# EAGLE board MoDsMega (EAGLE 4.16), part 1 of 2
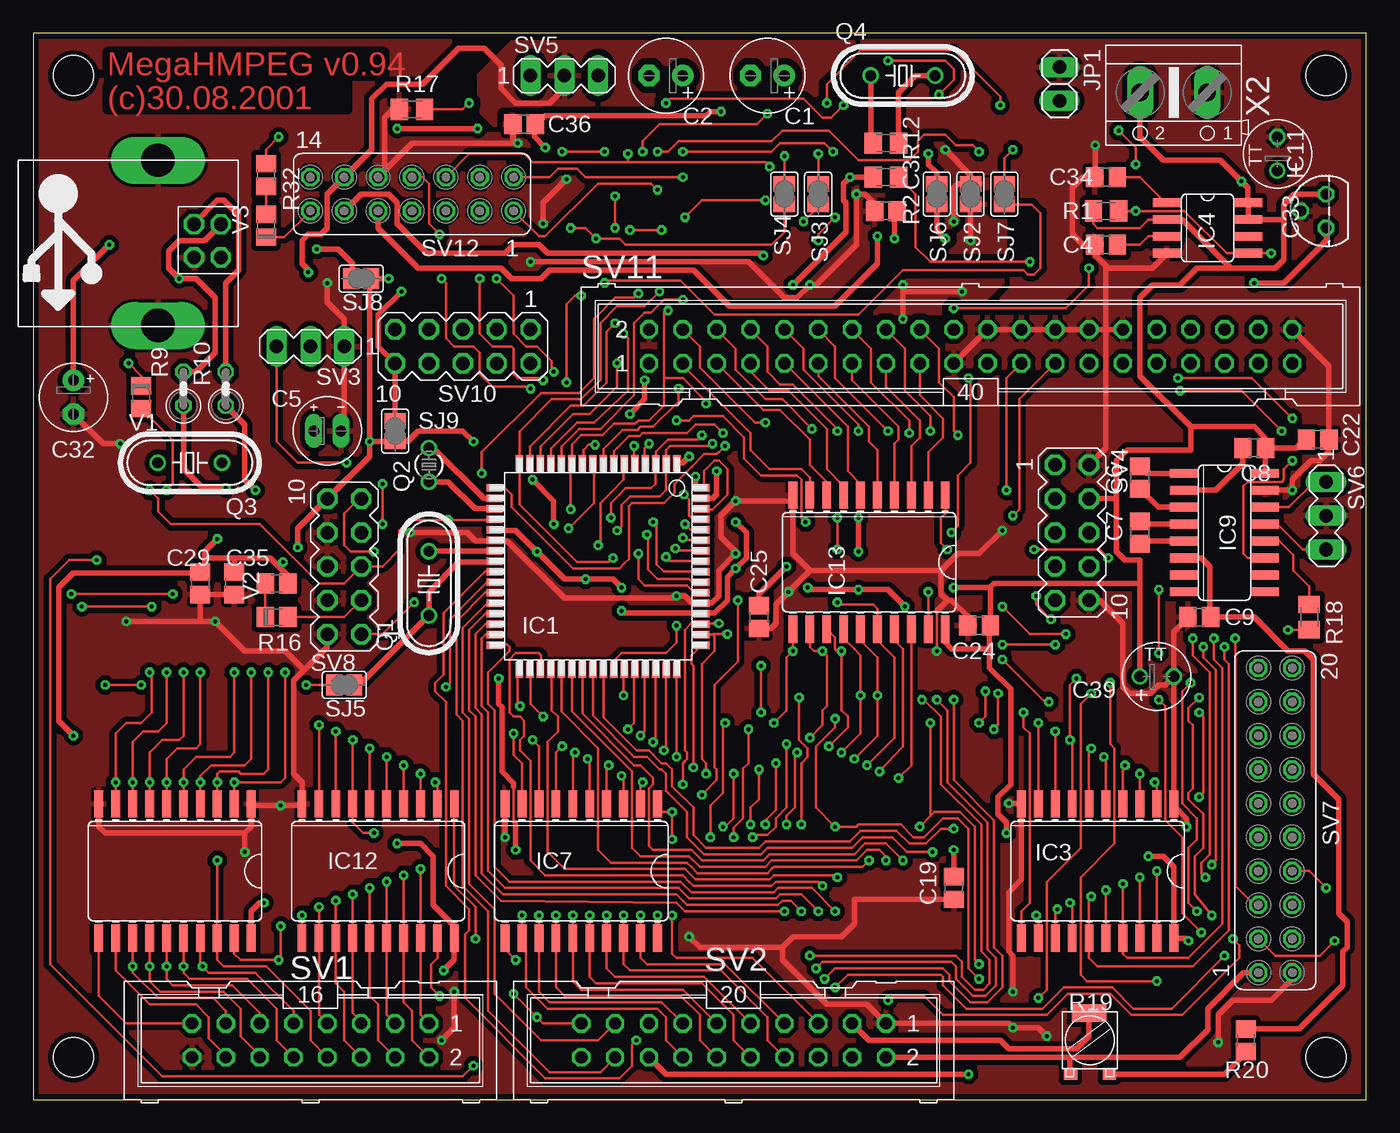
[diagram p0: board, top side]
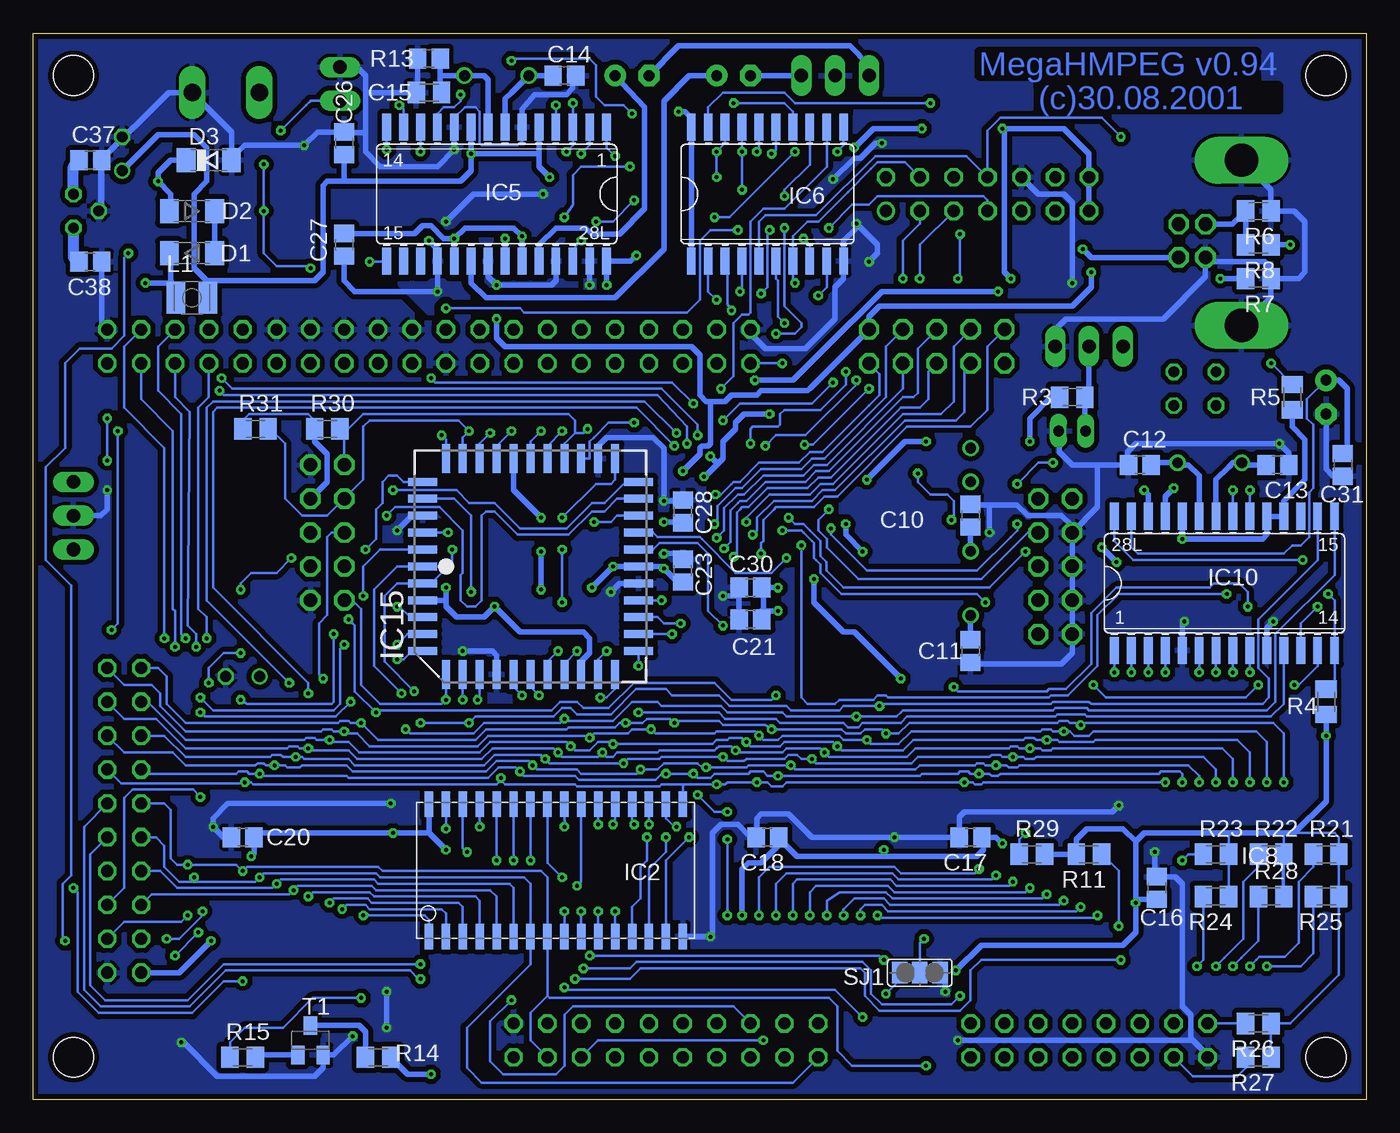
[diagram p1: board, bottom side, seen from below]

Size 100 x 80 mm. Coordinates in mm from the lower left corner, seen from the top.
Outline: 0,0 100,0 100,80 0,80 0,0
Copper layers (1*16): Top 0.035mm / dielectric 1.5mm / Bottom 0.035mm
Design rules "default": minimum track width 0.2mm, minimum drill 0.3mm, track to track 0.2mm, track to pad 0.2mm, pad to pad 0.2mm, via to via 0.2mm, smd to smd 0.2mm, copper to edge 0.2mm, drill to drill 8mil, minimum pad ring 0.2mm, minimum via ring 0.2mm, stop-mask expansion 0mil, vias tented up to drill 0mil, thermal gap 10mil
Holes 3 mm at 3.01,76.83 3.01,3.17 96.99,3.17 96.99,76.83
tRestrict: area 8.1,69.2 to 10.6,71.7; area 8.1,56.8 to 10.6,59.4
bRestrict: area 8.1,69.2 to 10.6,71.7; area 8.1,56.8 to 10.6,59.4

## Footprints (pad centres in the part's own frame; a part is rotated, then mirrored left to right if it is on the bottom)
E2,5-6 = drill 0.813 pad 1.6 round: + -1.27,0 | drill 0.813 pad 1.6 octagon: - 1.27,0
C0805 = smd 1.3 x 1.5: 1 -0.85,0; 2 0.85,0
E2-5 = drill 0.813 pad 1.27 long: + -1.016,0; - 1.016,0
E2,5-5 = drill 0.813 pad 1.6 round: + -1.27,0 | drill 0.813 pad 1.6 octagon: - 1.27,0
TT2D5 = drill 0.813 round: + 1.27,0 | drill 0.813 octagon: - -1.27,0
SOD80 = smd 1.4 x 1.8: 1 -1.7,0; 2 1.7,0
SOD80C = smd 1.4 x 1.8: A 1.7,0; C -1.7,0
TQFP64 = smd 1.194 x 0.559: 1 -7.76,5.905; 2 -7.76,5.118; 3 -7.76,4.331; 4 -7.76,3.543; 5 -7.76,2.756; 6 -7.76,1.968; 7 -7.76,1.181; 8 -7.76,0.394; 9 -7.76,-0.394; 10 -7.76,-1.181; 11 -7.76,-1.968; 12 -7.76,-2.756; 13 -7.76,-3.543; 14 -7.76,-4.331; 15 -7.76,-5.118; 16 -7.76,-5.905; 33 7.76,-5.905; 34 7.76,-5.118; 35 7.76,-4.331; 36 7.76,-3.543; 37 7.76,-2.756; 38 7.76,-1.968; 39 7.76,-1.181; 40 7.76,-0.394; 41 7.76,0.394; 42 7.76,1.181; 43 7.76,1.968; 44 7.76,2.756; 45 7.76,3.543; 46 7.76,4.331; 47 7.76,5.118; 48 7.76,5.905 | smd 0.559 x 1.194: 17 -5.905,-7.76; 18 -5.118,-7.76; 19 -4.331,-7.76; 20 -3.543,-7.76; 21 -2.756,-7.76; 22 -1.968,-7.76; 23 -1.181,-7.76; 24 -0.394,-7.76; 25 0.394,-7.76; 26 1.181,-7.76; 27 1.968,-7.76; 28 2.756,-7.76; 29 3.543,-7.76; 30 4.331,-7.76; 31 5.118,-7.76; 32 5.905,-7.76; 49 5.905,7.76; 50 5.118,7.76; 51 4.331,7.76; 52 3.543,7.76; 53 2.756,7.76; 54 1.968,7.76; 55 1.181,7.76; 56 0.394,7.76; 57 -0.394,7.76; 58 -1.181,7.76; 59 -1.968,7.76; 60 -2.756,7.76; 61 -3.543,7.76; 62 -4.331,7.76; 63 -5.118,7.76; 64 -5.905,7.76
SOJ32/4 = smd 0.635 x 1.905: 1 -8.89,-4.902; 2 -7.62,-4.902; 3 -6.35,-4.902; 4 -5.08,-4.902; 5 -3.81,-4.902; 6 -2.54,-4.902; 7 -1.27,-4.902; 8 0,-4.902; 9 1.27,-4.902; 10 2.54,-4.902; 11 3.81,-4.902; 12 5.08,-4.902; 13 6.35,-4.902; 14 7.62,-4.902; 15 8.89,-4.902; 16 10.16,-4.902; 17 10.16,5.029; 18 8.89,5.029; 19 7.62,5.029; 20 6.35,5.029; 21 5.08,5.029; 22 3.81,5.029; 23 2.54,5.029; 24 1.27,5.029; 25 0,5.029; 26 -1.27,5.029; 27 -2.54,5.029; 28 -3.81,5.029; 29 -5.08,5.029; 30 -6.35,5.029; 31 -7.62,5.029; 32 -8.89,5.029
SO20W = smd 0.66 x 2.032: 1 -5.715,-5.029; 2 -4.445,-5.029; 3 -3.175,-5.029; 4 -1.905,-5.029; 5 -0.635,-5.029; 6 0.635,-5.029; 7 1.905,-5.029; 8 3.175,-5.029; 9 4.445,-5.029; 10 5.715,-5.029; 11 5.715,5.029; 12 4.445,5.029; 13 3.175,5.029; 14 1.905,5.029; 15 0.635,5.029; 16 -0.635,5.029; 17 -1.905,5.029; 18 -3.175,5.029; 19 -4.445,5.029; 20 -5.715,5.029
SO08 = smd 0.66 x 2.032: 1 -1.905,-3.073; 2 -0.635,-3.073; 3 0.635,-3.073; 4 1.905,-3.073; 5 1.905,3.073; 6 0.635,3.073; 7 -0.635,3.073; 8 -1.905,3.073
SOIC28 = smd 0.66 x 2.032: 1 -8.255,-5.029; 2 -6.985,-5.029; 3 -5.715,-5.029; 4 -4.445,-5.029; 5 -3.175,-5.029; 6 -1.905,-5.029; 7 -0.635,-5.029; 8 0.635,-5.029; 9 1.905,-5.029; 10 3.175,-5.029; 11 4.445,-5.029; 12 5.715,-5.029; 13 6.985,-5.029; 14 8.255,-5.029; 15 8.255,5.029; 16 6.985,5.029; 17 5.715,5.029; 18 4.445,5.029; 19 3.175,5.029; 20 1.905,5.029; 21 0.635,5.029; 22 -0.635,5.029; 23 -1.905,5.029; 24 -3.175,5.029; 25 -4.445,5.029; 26 -5.715,5.029; 27 -6.985,5.029; 28 -8.255,5.029
SO16 = smd 0.66 x 2.032: 1 -4.445,-3.073; 2 -3.175,-3.073; 3 -1.905,-3.073; 4 -0.635,-3.073; 5 0.635,-3.073; 6 1.905,-3.073; 7 3.175,-3.073; 8 4.445,-3.073; 9 4.445,3.073; 10 3.175,3.073; 11 1.905,3.073; 12 0.635,3.073; 13 -0.635,3.073; 14 -1.905,3.073; 15 -3.175,3.073; 16 -4.445,3.073
TO92 = drill 0.813 octagon: 1 -1.27,0; 2 0,1.905; 3 1.27,0
PLCC44 = smd 0.6 x 2.2: 1 0,8.1; 2 -1.27,8.1; 3 -2.54,8.1; 4 -3.81,8.1; 5 -5.08,8.1; 6 -6.35,8.1; 18 -6.35,-8.1; 19 -5.08,-8.1; 20 -3.81,-8.1; 21 -2.54,-8.1; 22 -1.27,-8.1; 23 0,-8.1; 24 1.27,-8.1; 25 2.54,-8.1; 26 3.81,-8.1; 27 5.08,-8.1; 28 6.35,-8.1; 40 6.35,8.1; 41 5.08,8.1; 42 3.81,8.1; 43 2.54,8.1; 44 1.27,8.1 | smd 2.2 x 0.6: 7 -8.1,6.35; 8 -8.1,5.08; 9 -8.1,3.81; 10 -8.1,2.54; 11 -8.1,1.27; 12 -8.1,0; 13 -8.1,-1.27; 14 -8.1,-2.54; 15 -8.1,-3.81; 16 -8.1,-5.08; 17 -8.1,-6.35; 29 8.1,-6.35; 30 8.1,-5.08; 31 8.1,-3.81; 32 8.1,-2.54; 33 8.1,-1.27; 34 8.1,0; 35 8.1,1.27; 36 8.1,2.54; 37 8.1,3.81; 38 8.1,5.08; 39 8.1,6.35
1X02 = drill 1.016 long: 1 -1.27,0; 2 1.27,0
L2825P = smd 1.4 x 2.4: 1 -1.2,0; 2 1.2,0
HC49/S = drill 0.813 round: 1 -2.413,0; 2 2.413,0
TC26V = drill 0.813 round: 1 -1.27,0; 2 1.27,0
M0805 = smd 1.3 x 1.6: 1 -0.95,0; 2 0.95,0
0207/2V = drill 0.813 octagon: 1 -1.27,0; 2 1.27,0
R0805 = smd 1.3 x 1.5: 1 -0.85,0; 2 0.85,0
SMD1/6 = smd 1 x 0.9: P1 -1.395,-2.52; P2 1.52,-2.52 | smd 2.6 x 1.3: S 0,2.04
SJ_2 = smd 1.168 x 1.6: 1 -1.524,0; 2 0,0; 3 1.524,0
SJ = smd 1.168 x 1.6: 1 -0.762,0; 2 0.762,0
ML16 = drill 0.914 octagon: 1 -8.89,-1.27; 2 -8.89,1.27; 3 -6.35,-1.27; 4 -6.35,1.27; 5 -3.81,-1.27; 6 -3.81,1.27; 7 -1.27,-1.27; 8 -1.27,1.27; 9 1.27,-1.27; 10 1.27,1.27; 11 3.81,-1.27; 12 3.81,1.27; 13 6.35,-1.27; 14 6.35,1.27; 15 8.89,-1.27; 16 8.89,1.27
ML20 = drill 0.914 octagon: 1 -11.43,-1.27; 2 -11.43,1.27; 3 -8.89,-1.27; 4 -8.89,1.27; 5 -6.35,-1.27; 6 -6.35,1.27; 7 -3.81,-1.27; 8 -3.81,1.27; 9 -1.27,-1.27; 10 -1.27,1.27; 11 1.27,-1.27; 12 1.27,1.27; 13 3.81,-1.27; 14 3.81,1.27; 15 6.35,-1.27; 16 6.35,1.27; 17 8.89,-1.27; 18 8.89,1.27; 19 11.43,-1.27; 20 11.43,1.27
MA03-1 = drill 1.016 long: 1 -2.54,0; 2 0,0; 3 2.54,0
MA05-2 = drill 1.016 octagon: 1 -5.08,-1.27; 2 -5.08,1.27; 3 -2.54,-1.27; 4 -2.54,1.27; 5 0,-1.27; 6 0,1.27; 7 2.54,-1.27; 8 2.54,1.27; 9 5.08,-1.27; 10 5.08,1.27
FE10-2 = drill 0.914 octagon: 1 -11.43,1.27; 2 -11.43,-1.27; 3 -8.89,1.27; 4 -8.89,-1.27; 5 -6.35,1.27; 6 -6.35,-1.27; 7 -3.81,1.27; 8 -3.81,-1.27; 9 -1.27,1.27; 10 -1.27,-1.27; 11 1.27,1.27; 12 1.27,-1.27; 13 3.81,1.27; 14 3.81,-1.27; 15 6.35,1.27; 16 6.35,-1.27; 17 8.89,1.27; 18 8.89,-1.27; 19 11.43,1.27; 20 11.43,-1.27
ML40 = drill 0.914 octagon: 1 -24.13,-1.27; 2 -24.13,1.27; 3 -21.59,-1.27; 4 -21.59,1.27; 5 -19.05,-1.27; 6 -19.05,1.27; 7 -16.51,-1.27; 8 -16.51,1.27; 9 -13.97,-1.27; 10 -13.97,1.27; 11 -11.43,-1.27; 12 -11.43,1.27; 13 -8.89,-1.27; 14 -8.89,1.27; 15 -6.35,-1.27; 16 -6.35,1.27; 17 -3.81,-1.27; 18 -3.81,1.27; 19 -1.27,-1.27; 20 -1.27,1.27; 21 1.27,-1.27; 22 1.27,1.27; 23 3.81,-1.27; 24 3.81,1.27; 25 6.35,-1.27; 26 6.35,1.27; 27 8.89,-1.27; 28 8.89,1.27; 29 11.43,-1.27; 30 11.43,1.27; 31 13.97,-1.27; 32 13.97,1.27; 33 16.51,-1.27; 34 16.51,1.27; 35 19.05,-1.27; 36 19.05,1.27; 37 21.59,-1.27; 38 21.59,1.27; 39 24.13,-1.27; 40 24.13,1.27
FE07-2 = drill 0.914 round: 1 -7.62,1.27 | drill 0.914 octagon: 2 -7.62,-1.27; 3 -5.08,1.27; 4 -5.08,-1.27; 5 -2.54,1.27; 6 -2.54,-1.27; 7 0,1.27; 8 0,-1.27; 9 2.54,1.27; 10 2.54,-1.27; 11 5.08,1.27; 12 5.08,-1.27; 13 7.62,1.27; 14 7.62,-1.27
SOT23 = smd 1 x 1.4: 1 -0.95,-1.1; 2 0.95,-1.1; 3 0,1.1
LED0805 = smd 1.3 x 1.5: A -0.85,0; K 0.85,0
USBCONB = drill 1.016 octagon: 1 7.3,4.7; 2 4.8,4.7; 3 4.8,2.7; 4 7.3,2.7 | drill 2.5 long: S1 0,0; S2 12.4,0
AK500/2 = drill 1.321 long: 1 -2.515,0; 2 2.515,0

## Placement (x,y rotation side)
C1  100µ  [E2,5-6]  55.08,76.83 180 top
C2  100µ  [E2,5-6]  47.46,76.83 180 top
C3  100n  [C0805]  63.97,66.67 0 top
C4  100n  [C0805]  80.48,64.13 180 top
C5  10µ  [E2-5]  22.06,50.16 0 top
C6  100n  [C0805]  83.02,46.67 90 top
C7  100n  [C0805]  83.02,42.54 90 top
C8  100n  [C0805]  91.59,48.89 180 top
C9  100n  [C0805]  87.47,36.19 0 top
C10  27p  [C0805]  29.68,43.81 90 bottom
C11  27p  [C0805]  29.68,33.65 270 bottom
C12  27p  [C0805]  16.98,47.62 0 bottom
C13  27p  [C0805]  6.66,47.62 180 bottom
C14  33p  [C0805]  60.16,76.83 0 bottom
C15  10p  [C0805]  70.32,78.1 180 bottom
C16  100n  [C0805]  15.71,15.87 90 bottom
C17  100n  [C0805]  29.68,19.68 180 bottom
C18  100n  [C0805]  44.92,19.68 180 bottom
C19  100n  [C0805]  69.05,15.87 270 top
C20  100n  [C0805]  84.29,19.68 180 bottom
C21  100n  [C0805]  46.19,38.41 180 bottom
C22  100n  [C0805]  96.36,49.53 0 top
C23  100n  [C0805]  51.27,39.68 90 bottom
C24  100n  [C0805]  70.95,35.55 180 top
C25  100n  [C0805]  54.45,36.19 270 top
C26  100n  [C0805]  76.67,71.75 270 bottom
C27  100n  [C0805]  76.67,64.13 90 bottom
C28  10n  [C0805]  51.27,44.13 270 bottom
C29  10n  [C0805]  15.08,38.73 90 top
C30  10n  [C0805]  46.19,36.03 0 bottom
C31  100n  [C0805]  1.74,47.62 90 bottom
C32  1µ  [E2,5-5]  3.01,52.7 270 top
C33  10µ  [TT2D5]  93.34,70.96 270 top
C34  100n  [C0805]  80.48,69.21 180 top
C35  100n  [C0805]  12.54,38.73 270 top
C36  100n  [C0805]  36.82,73.18 180 top
C37  100n  [C0805]  95.72,70.48 180 bottom
C38  100n  [C0805]  95.72,62.86 180 bottom
C39  10µ  [TT2D5]  84.29,31.74 180 top
D1  4148  [SOD80]  88.1,66.67 180 bottom
D2  4148  [SOD80]  88.1,63.5 0 bottom
D3  1A  [SOD80C]  86.83,70.48 0 bottom
IC1  MEGA103  [TQFP64]  42.38,40 270 top
IC2  512k SRAM  [SOJ32/4]  61.43,17.14 0 bottom
IC3  74HC573D  [SO20W]  79.84,17.14 180 top
IC4  TL7705A  [SO08]  88.1,65.4 270 top
IC5  VS1001  [SOIC28]  65.24,67.94 180 bottom
IC6  74LS245DW  [SO20W]  44.92,67.94 0 bottom
IC7  74HC573D  [SO20W]  41.11,17.14 180 top
IC8  74HC245DW  [SO20W]  10.63,17.14 180 top
IC9  MAX232A  [SO16]  89.37,42.54 270 top
IC10  PDIUSB12  [SOIC28]  10.63,38.73 0 bottom
IC11  LE33CZ  [TO92]  96.99,66.67 90 top
IC12  74HC245DW  [SO20W]  25.87,17.14 180 top
IC13  74HC245DW  [SO20W]  62.7,40.32 180 top
IC15  EPM7032-J44  [PLCC44]  62.7,40 90 bottom
JP1  [1X02]  76.99,76.2 270 top
L1  10µ  [L2825P]  88.1,60.16 0 bottom
Q1  6,000  [HC49/S]  29.68,38.73 90 top
Q2  32,786k  [TC26V]  29.68,47.62 90 top
Q3  6,000  [HC49/S]  11.74,47.78 180 top
Q4  24,576  [HC49/S]  65.24,76.83 0 top
R1  10k  [M0805]  80.48,66.67 180 top
R2  10k  [M0805]  63.97,69.21 180 top
R3  47  [M0805]  22.06,52.7 0 bottom
R4  10k  [M0805]  3.01,29.84 270 bottom
R5  470  [M0805]  5.55,52.7 90 bottom
R6  1M  [M0805]  8.09,66.67 180 bottom
R7  1M  [M0805]  8.09,61.59 180 bottom
R8  1,5k  [M0805]  8.09,64.13 180 bottom
R9  18/1%  [0207/2V]  11.27,53.34 90 top
R10  18/1%  [0207/2V]  14.44,53.34 90 top
R11  [M0805]  20.79,18.41 180 bottom
R12  240k  [M0805]  63.97,71.75 0 top
R13  1M  [M0805]  70.32,75.56 0 bottom
R14  10  [M0805]  74.13,3.17 0 bottom
R15  3,3k  [M0805]  84.29,3.17 0 bottom
R16  470  [R0805]  18.25,38.73 180 top
R17  10k  [M0805]  28.41,74.29 0 top
R18  4,7k  [M0805]  95.72,36.19 270 top
R19  10k  [SMD1/6]  79.21,4.44 0 top
R20  4.7k  [R0805]  90.96,4.44 90 top
R21  10k  [M0805]  3.01,18.41 0 bottom
R22  10k  [M0805]  7.14,18.41 0 bottom
R23  10k  [M0805]  11.27,18.41 0 bottom
R24  10k  [M0805]  11.27,15.24 180 bottom
R25  10k  [M0805]  3.01,15.24 180 bottom
R26  10k  [M0805]  8.09,5.71 180 bottom
R27  10k  [M0805]  8.09,3.17 180 bottom
R28  10k  [M0805]  7.14,15.24 0 bottom
R29  [M0805]  25.08,18.41 0 bottom
R30  [M0805]  77.94,50.32 0 bottom
R31  [M0805]  83.34,50.32 0 bottom
R32  1k  [R0805]  17.46,69.37 270 top
SJ1  [SJ_2]  33.49,9.52 180 bottom
SJ2  [SJ]  72.86,67.94 90 top
SJ3  [SJ]  58.89,67.94 90 top
SJ4  [SJ]  56.35,67.94 90 top
SJ5  [SJ]  23.33,31.11 180 top
SJ6  [SJ]  67.78,67.94 270 top
SJ7  [SJ]  70.32,67.94 270 top
SJ8  [SJ]  24.6,61.59 180 top
SJ9  [SJ]  27.14,50.16 270 top
SV1  Tastatur  [ML16]  20.79,4.44 180 top
SV2  Display  [ML20]  52.54,4.44 180 top
SV3  IR  [MA03-1]  20.79,56.51 180 top
SV4  [MA05-2]  77.94,42.54 270 top
SV5  Audio  [MA03-1]  39.84,76.83 0 top
SV6  RS232  [MA03-1]  96.99,43.81 270 top
SV7  HEB  [FE10-2]  93.18,20.95 90 top
SV8  AVRisp  [MA05-2]  23.33,40 90 top
SV10  Analog  [MA05-2]  32.22,56.51 180 top
SV11  IDE  [ML40]  70.32,56.51 0 top
SV12  MAS  [FE07-2]  28.41,67.94 180 top
T1  BC847  [SOT23]  79.21,4.44 0 bottom
V1  [LED0805]  8.09,52.7 270 top
V2  [LED0805]  18.25,36.19 0 top
V3  [LED0805]  17.46,65.56 90 top
X1  [USBCONB]  9.36,70.48 270 top
X2  +Ub  [AK500/2]  85.56,75.56 180 top

## Library data of the parts
C1-C39 L1 R1-R18 R20-R32 = rcl
D1 D2 = semicon-smd-ipc
D3 = diode
IC1 = atmel
IC2 = memory-sram
IC3 IC6-IC8 IC12 IC13 = 74xx-eu
IC4 IC9 = maxim
IC5 = VLSI
IC10 X1 = USB
IC11 = linear
IC15 = altera
JP1 = pinhead
Q1-Q4 = crystal
R19 = pot
SJ1-SJ9 = jumper
SV1 SV2 SV11 = con-harting-ml
SV3-SV6 SV8 SV10 = con-lstb
SV7 SV12 = con-lsta
T1 = transistor-npn
V1-V3 = led
X2 = con-ptr500

## Nets
/DIOR: IC15.27 SV11.25
/DIOW: IC15.28 SV11.23
A0: IC2.8 IC3.19 IC10.28 SV2.4 SV7.11 SV11.35
A1: IC2.7 IC3.18 SV2.20 SV7.9 SV11.33
A2: IC2.6 IC3.17 SV7.7 SV11.36
A3: IC2.5 IC3.16 SV7.5 SV11.38
A4: IC2.4 IC3.15 SV11.37
A5: IC2.3 IC3.14
A6: IC2.2 IC3.13
A7: IC2.1 IC3.12
A8: IC1.35 IC2.23
A9: IC1.36 IC2.25
A10: IC1.37 IC2.26
A11: IC1.38 IC2.27
A12: IC1.39 IC2.28
A13: IC1.40 IC2.30
A14: IC1.41 IC2.31
A15: IC1.42 IC15.24
A15P: IC1.30 IC2.11
A16P: IC1.31 IC2.10
A17P: IC1.32 IC2.9
A18P: IC1.29 IC2.12
ALE: IC1.43 IC3.11 IC15.44
AVRCLK: C11.1 IC1.24 Q1.1 SJ5.1
BSYNC: IC1.15 IC6.6
BSYNC3,3: IC5.4 IC6.14
CS_R/: IC2.22 IC15.17
CS_U/: IC10.11 IC15.18
D0: IC1.51 IC2.17 IC3.2 IC7.2 IC8.2 IC10.1 IC12.2 IC13.18 IC15.20 SV7.14
D1: IC1.50 IC2.18 IC3.3 IC7.3 IC8.3 IC10.2 IC12.3 IC13.17 IC15.19 SV7.13
D2: IC1.49 IC2.19 IC3.4 IC7.4 IC8.4 IC10.3 IC12.4 IC13.16 IC15.29 SV7.16
D3: IC1.48 IC2.20 IC3.5 IC7.5 IC8.5 IC10.4 IC12.5 IC13.15 IC15.11 SV7.15
D4: IC1.47 IC2.21 IC3.6 IC7.6 IC8.6 IC10.6 IC12.6 IC13.14 IC15.12 SV7.18
D5: IC1.46 IC2.13 IC3.7 IC7.7 IC8.7 IC10.7 IC12.7 IC13.13 IC15.13 R29.1 SV4.5 SV7.17
D6: IC1.45 IC2.14 IC3.8 IC7.8 IC8.8 IC10.8 IC12.8 IC13.12 IC15.14 SV7.20
D7: IC1.44 IC2.15 IC3.9 IC7.9 IC8.9 IC10.9 IC12.9 IC13.11 IC15.16 SV7.19
D+: R6.2 R8.2 R10.2 X1.3
D-: R7.2 R9.2 X1.2
DCLK: IC6.9 IC15.26
DD0: IC7.19 IC12.18 SV1.1 SV2.7
DD1: IC7.18 IC12.17 SV1.2 SV2.8
DD2: IC7.17 IC12.16 SV1.3 SV2.9
DD3: IC7.16 IC12.15 SV1.4 SV2.10
DD4: IC7.15 IC12.14 SV1.5 SV2.11
DD5: IC7.14 IC12.13 SV1.6 SV2.12
DD6: IC7.13 IC12.12 SV1.7 SV2.13
DD7: IC7.12 IC12.11 SV2.14
DREQ: IC1.8 IC6.12
DREQ/DEM: IC6.8 SJ4.1 SV12.7
E_INT: IC1.7 SV7.8
E_SIG1: IC15.6 SV7.6
E_SIG2: IC15.5 SV7.4
GND: C3.1 C4.2 C5.- C9.1 C10.2 C11.2 C12.1 C13.1 C14.2 C15.2 C16.2 C17.2 C18.2 C19.2 C20.2 C21.2 C22.2 C23.2 C24.2 C25.2 C26.1 C28.1 C29.1 C30.1 C31.1 C32.- C33.- C34.2 C35.2 C36.2 C37.1 C38.1 C39.- D3.A IC1.22 IC1.53 IC2.16 IC3.1 IC3.10 IC4.4 IC5.6 IC5.10 IC5.27 IC6.10 IC7.10 IC8.1 IC8.10 IC9.15 IC10.5 IC10.10 IC11.2 IC12.10 IC13.10 IC15.10 IC15.22 IC15.30 IC15.42 JP1.1 R6.1 R7.1 R13.1 R17.1 SJ1.1 SJ7.1 SV1.16 SV2.1 SV3.1 SV4.2 SV4.10 SV6.2 SV7.2 SV8.2 SV8.4 SV8.6 SV8.8 SV11.2 SV11.19 SV11.22 SV11.24 SV11.26 SV11.28 SV11.30 SV11.40 SV12.10 T1.2 X1.4 X1.S1 X1.S2 X2.1
GNDA: C27.1 IC1.63 IC5.18 IC5.21 IC5.25 SJ7.2 SV5.2 SV10.1 SV12.12
IDD: IC13.19 IC15.41
IDE0: IC13.2 SV11.17
IDE1: IC13.3 SV11.15
IDE2: IC13.4 SV11.13
IDE3: IC13.5 SV11.11
IDE4: IC13.6 SV11.9
IDE5: IC13.7 SV11.7
IDE6: IC13.8 SV11.5
IDE7: IC13.9 SV11.3
IDE8: IC15.31 SV11.4
IDE9: IC15.32 R30.2 SV4.1 SV11.6
IDE10: IC15.33 SV11.8
IDE11: IC15.34 SV11.10
IDE12: IC15.36 SV11.12
IDE13: IC15.37 SV11.14
IDE14: IC15.38 R31.2 SV4.3 SV11.16
IDE15: IC15.39 SV11.18
IDE_R/: IC1.14 SV11.1
IR: IC1.9 SV3.3
LCD_B: IC1.17 R15.1
LCD_BL: R14.2 SV2.16
LCD_C1: IC1.27 SV2.18
LCD_C2: IC1.28 SV2.17
LCD_E: IC1.25 SV2.6
LCD_G: IC15.4 SJ1.3 SV2.19
LCD_S1: IC15.40 SV2.15
LCD_VO: R19.S SV2.3
MISO: IC1.13 IC6.13
MOSI: IC1.12 IC6.2
MOSI3,3: IC5.3 IC5.13 IC6.18 SV12.2
MP3: IC1.16 IC6.4 IC15.25
N$1: IC1.18 Q2.2
N$2: IC1.19 Q2.1
N$3: R14.1 T1.3
N$4: C34.1 IC4.1
N$5: C4.1 IC4.3
N$6: IC5.11 IC6.16
N$7: C38.2 D2.1 IC11.1 L1.1
N$8: C5.+ R3.2 SV3.2
N$9: SJ8.2 X1.1
N$10: R19.P2 R20.1
N$11: R32.2 V3.K
N$12: R15.2 T1.1
N$13: C6.1 IC9.3
N$14: C6.2 IC9.1
N$15: C8.2 IC9.2
N$18: C9.2 IC9.6 R20.2
N$19: C14.1 IC5.7 Q4.1 R12.1
N$20: C7.2 IC9.4
N$21: IC10.21 V1.K
N$22: R5.2 V1.A
N$23: IC6.19 R17.2
N$24: D1.1 D2.2
N$25: IC10.25 R9.1
N$34: R16.2 V2.A
N$35: IC6.11 SJ3.1
N$36: IC5.2 SJ3.2
N$37: IC6.7 SJ2.1 SV12.4
N$38: IC5.15 R2.1
N$39: C1.+ IC5.24
N$40: C2.+ IC5.20
N$41: C3.2 IC5.22
N$42: C2.- SV5.3
N$43: C1.- SV5.1
N$44: C7.1 IC9.5
N$45: IC10.26 R10.1
N$47: IC9.14 SV6.1
N$48: IC9.13 SV6.3
N$50: C13.2 IC10.22 Q3.2
N$51: C31.2 C32.+ IC10.27 R8.1
N$52: C12.2 IC10.23 Q3.1
N$53: C15.1 IC5.8 Q4.2 R12.2 R13.2
N$54: SV8.3 V2.K
N$55: IC10.13 SJ5.2
N$56: IC5.1 SJ4.2
N$57: IC12.1 SJ1.2
N$58: IC5.14 SJ2.2
N$76: IC9.12 R18.1
OE_DL/: IC7.1 IC15.21 SV2.5
PB0: IC1.10 IC6.5 R32.1 SV12.8
PF0: IC1.61 SV10.2
PF1: IC1.60 SV10.3
PF2: IC1.59 SV10.4
PF3: IC1.58 SV10.5
PF4: IC1.57 SV10.6
PF5: IC1.56 SV10.7
PF6: IC1.55 SV10.8
PF7: IC1.54 SV10.9
RD/: IC1.34 IC2.24 IC10.15 IC15.1 SV7.12
RD_D/: IC12.19 IC15.8
RD_T/: IC8.19 IC15.7 R11.1 SV4.9
RST3,3: IC5.26 IC6.15 SV12.6
RST/: IC1.20 IC4.5 IC10.20 JP1.2 R1.1 SV7.3 SV8.5
RX: IC1.2 R18.2 SV8.1
SCK: IC1.11 IC6.3 IC15.43 SV8.7
SCK3,3: IC5.12 IC6.17 SV12.1
SCL: IC1.4 SV12.3
SDA: IC1.5 SV12.5
TX: IC1.3 IC9.11 SV8.9
TZ1: IC8.18 R23.1 SV1.8
TZ2: IC8.17 R24.2 SV1.9
TZ3: IC8.16 R22.1 SV1.10
TZ4: IC8.15 R28.1 SV1.11
TZ5: IC8.14 R21.1 SV1.12
TZ6: IC8.13 R25.2 SV1.13
TZ7: IC8.12 R27.2 SV1.14
TZ8: IC8.11 R26.2 SV1.15
USB_I: IC1.6 IC10.14 R4.1
USB_S: IC1.26 IC10.12
VCC: C8.1 C16.1 C17.1 C18.1 C19.1 C20.1 C21.1 C22.1 C23.1 C24.1 C25.1 C28.2 C29.2 C30.2 C35.1 C36.1 C37.2 C39.+ D1.2 D3.C IC1.21 IC1.52 IC2.32 IC3.20 IC4.2 IC4.7 IC4.8 IC6.1 IC6.20 IC7.20 IC8.20 IC9.16 IC10.18 IC10.19 IC10.24 IC11.3 IC12.20 IC13.20 IC15.3 IC15.15 IC15.23 IC15.35 R1.2 R3.1 R4.2 R5.1 R11.2 R16.1 R19.P1 R21.2 R22.2 R23.2 R24.1 R25.1 R26.1 R27.1 R28.2 R29.2 R30.1 R31.1 SJ8.1 SJ9.2 SV2.2 SV4.4 SV7.1 SV8.10 SV12.13 SV12.14 V3.A X2.2
VCC/2: IC1.1 IC1.62 IC1.64 SJ9.1 SV10.10
VCCINT: C27.2 IC5.19 IC5.23 SJ6.2 SV12.9
VDD: C26.2 C33.+ IC5.5 IC5.9 IC5.28 L1.2 R2.2 SJ6.1 SV12.11
WR/: IC1.33 IC2.29 IC10.16 IC13.1 IC15.2 SV7.10
WR_D/: IC7.11 IC15.9
XTAL2: C10.1 IC1.23 Q1.2

## Tracks (layer width: path | path; a pad name or v marks a point on that pad's centre or on a via)
/DIOR  (via drill 0.3)
  Top 0.2: v73.5,43.81 73.97,44.29 73.97,52.54 SV11.25
  Bottom 0.2: 67.94,39.37 67.94,37.46 67.46,36.98 66.83,36.98 66.35,37.46 66.35,43.81 66.03,44.13 65.4,44.13 63.65,42.38 59.84,42.38 58.1,44.13 57.14,44.13 56.19,45.08 IC15.27 | 67.94,39.37 | 67.94,39.37 67.78,39.52 67.78,42.7 69.53,44.45 72.86,44.45 v73.5,43.81
/DIOW  (via drill 0.3)
  Top 0.2: v73.02,45.72 73.02,54.13 SV11.23
  Bottom 0.2: v73.02,45.72 68.26,45.72 67.3,44.76 65.4,44.76 63.49,42.86 60,42.86 58.1,44.76 57.14,44.76 55.56,46.35 IC15.28
A0  (via drill 0.3)
  Top 0.2: v84.29,17.14 IC3.19 | v88.42,17.62 88.73,17.93 88.73,32.22 87.78,33.17 v87.78,33.97 | v4.76,40.48 2.69,40.48 1.26,39.05 1.26,10.16 9.68,1.74 32.22,1.74 v33.01,2.54
  Bottom 0.2: SV7.11 90.16,22.22 89.69,21.74 89.69,18.09 89.21,17.62 v88.42,17.62 86.19,17.62 84.77,17.62 v84.29,17.14 83.97,17.46 74.13,17.46 73.81,17.14 61.91,17.14 61.43,16.66 IC2.8 61.43,7.77 | SV11.35 89.37,52.7 88.26,51.59 88.42,35.55 87.78,34.92 v87.78,33.97 | 61.43,7.77 62.7,6.5 62.7,4.44 SV2.4 | IC10.28 18.88,41.91 17.46,40.48 v4.76,40.48 | v33.01,2.54 38.57,2.54 39.68,3.65 39.68,6.98 40.32,7.62 59.37,7.62 59.68,7.62 61.27,7.62 61.43,7.77
A1  (via drill 0.3)
  Top 0.2: v83.02,16.66 IC3.18 | v87.94,16.66 87.62,16.98 87.62,17.77 88.26,18.41 88.26,32.06 86.99,33.33 v86.99,34.6
  Bottom 0.2: 87.94,16.35 83.34,16.35 v83.02,16.66 82.7,16.98 74.29,16.98 73.97,16.66 63.18,16.66 62.7,16.19 IC2.7 62.7,10.16 67.46,5.39 67.46,2.38 66.35,1.27 43.02,1.27 SV2.20 | 87.94,16.35 89.05,16.35 90.16,17.46 90.16,19.04 90.8,19.68 SV7.9 | SV11.33 86.83,52.7 87.62,51.91 87.62,36.83 86.99,36.19 v86.99,34.6 | 87.94,16.35 v87.94,16.66
A2  (via drill 0.3)
  Top 0.2: IC3.17 v81.75,16.19 81.75,10.95 82.07,10.63 86.67,10.63 89.21,13.17 89.21,32.38 88.58,33.02 v88.58,34.6
  Bottom 0.2: 63.97,12.06 IC2.6 63.97,15.87 64.29,16.19 74.13,16.19 74.45,16.5 81.43,16.5 v81.75,16.19 82.07,15.87 89.21,15.87 90.48,17.14 SV7.7 | SV11.36 90.64,56.51 90.64,53.18 88.89,51.43 88.89,34.92 v88.58,34.6
A3  (via drill 0.3)
  Top 0.2: v80.48,15.71 IC3.16 | v90.16,34.6 90.16,16.03 91.59,14.6 SV7.5
  Bottom 0.2: 65.24,12.06 IC2.5 65.24,15.24 65.72,15.71 74.29,15.71 74.61,16.03 80.16,16.03 v80.48,15.71 80.8,15.39 91.12,15.39 SV7.5 | SV11.38 93.18,56.51 93.18,51.91 90.16,48.89 v90.16,34.6
A4  (via drill 0.3)
  Top 0.2: 79.21,15.08 IC3.15 | v89.37,33.97 89.37,33.02 89.69,32.7 89.69,12.7 86.99,10 79.84,10 79.21,10.63 79.21,15.08 | v79.37,15.24 79.21,15.08
  Bottom 0.2: v79.37,15.24 79.05,15.55 74.77,15.55 74.45,15.24 66.83,15.24 66.51,14.92 IC2.4 | SV11.37 91.91,52.54 89.53,50.16 89.53,36.83 | v89.37,33.97 89.37,36.67 89.53,36.83 | 89.53,36.83
A5  (via drill 0.3)
  Top 0.2: v77.78,14.76 77.94,14.6 IC3.14
  Bottom 0.2: v77.78,14.76 77.46,15.08 74.92,15.08 74.61,14.76 68.1,14.76 67.78,14.44 IC2.3
A6  (via drill 0.3)
  Top 0.2: v76.83,14.28 | v76.83,14.28 76.67,14.12 IC3.13
  Bottom 0.2: v76.83,14.28 76.51,14.6 75.08,14.6 74.77,14.28 69.37,14.28 69.05,13.97 IC2.2
A7  (via drill 0.3)
  Top 0.2: v75.24,13.81 | v75.24,13.81 75.4,13.65 IC3.12
  Bottom 0.2: v75.24,13.81 70.64,13.81 70.32,13.49 IC2.1 70.32,12.22
A8  (via drill 0.3)
  Top 0.2: IC1.35 38.09,32.29 38.09,33.33 37.94,33.49 36.19,33.49 35.71,33.02 35.71,29.05 36.03,28.73 36.51,28.73 36.82,28.41 36.82,27.3 36.51,26.98 36.51,26.19 37.3,25.39 37.3,17.93 38.41,16.82 48.73,16.82 49.21,16.35 | 49.21,16.35 | 49.21,16.35 49.52,16.03 55.4,16.03 55.71,16.35 58.89,16.35 v59.21,16.03
  Bottom 0.2: 58.89,22.22 IC2.23 58.89,16.35 v59.21,16.03
A9  (via drill 0.3)
  Top 0.2: IC1.36 38.89,32.19 38.89,29.2 39.36,28.73 39.36,27.62 38.57,26.82 38.57,18.57 39.84,17.3 48.89,17.3 49.68,16.5 55.24,16.5 55.56,16.82 60.16,16.82 v60.32,16.66
  Bottom 0.2: v60.32,16.66 61.43,17.77 IC2.25
A10  (via drill 0.3)
  Top 0.2: IC1.37 39.62,29.1 42.38,26.35 42.38,18.73 43.33,17.77 49.05,17.77 49.37,17.46 | 49.37,17.46 | 49.37,17.46 49.84,16.98 55.08,16.98 55.4,17.3 | 55.4,17.3 | 55.4,17.3 55.56,17.46 62.22,17.46 v62.7,17.93
  Bottom 0.2: v62.7,17.93 IC2.26
A11  (via drill 0.3)
  Top 0.2: IC1.38 40.41,29.11 44.92,24.6 44.92,18.89 45.55,18.25 49.21,18.25 50,17.46 54.92,17.46 55.4,17.93 61.75,17.93 62.54,18.73 63.49,18.73 63.97,18.25 v63.97,17.93
  Bottom 0.2: v63.97,17.93 IC2.27
A12  (via drill 0.3)
  Top 0.2: IC1.39 41.2,28.96 45.08,25.08 45.55,25.08 46.51,24.12 46.51,23.65 46.19,23.33 46.19,19.04 46.51,18.73 49.37,18.73 50.16,17.93 54.76,17.93 55.08,18.25 | v65.24,17.93 63.97,19.2 62.38,19.2 61.59,18.41 55.24,18.41 55.08,18.25 | 55.08,18.25
  Bottom 0.2: v65.24,17.93 IC2.28
A13  (via drill 0.3)
  Top 0.2: IC1.40 41.99,28.8 45.08,25.71 46.03,25.71 46.98,24.76 47.14,24.76 47.46,24.44 47.46,23.17 47.62,23.01 | 47.62,23.01 | 47.62,23.01 49.05,21.58 49.05,19.68 50.32,18.41 54.6,18.41 55.08,18.89 61.43,18.89 62.22,19.68 64.45,19.68 65.56,18.57 v67.46,18.57
  Bottom 0.2: v67.46,18.57 67.78,18.89 IC2.30
A14  (via drill 0.3)
  Top 0.2: IC1.41 42.77,28.65 45.24,26.19 46.19,26.19 47.14,25.24 47.46,25.24 47.94,24.76 47.94,23.49 49.52,21.9 49.52,19.84 50.48,18.89 54.45,18.89 54.92,19.36 61.27,19.36 62.06,20.16 64.76,20.16 65.72,19.2 66.99,19.2 68.1,20.31 v69.05,20.31
  Bottom 0.2: 69.05,22.22 IC2.31 v69.05,20.31
A15  (via drill 0.3)
  Top 0.2: IC1.42 43.56,32.93 44.13,33.49 47.46,33.49 48.25,34.29 48.25,35.4 v48.25,35.55
  Bottom 0.2: v48.25,35.55 49.37,36.67 49.37,40.95 50.16,41.75 53.02,41.75 53.49,41.27 IC15.24
A15P  (via drill 0.3)
  Top 0.2: IC1.30 33.92,35.67 33.17,34.92 33.17,29.36 33.65,28.89 33.65,16.98 35.24,15.39 48.25,15.39 48.73,14.92 | 48.73,14.92 | 48.73,14.92 49.05,14.6 55.87,14.6 56.19,14.92 56.83,14.92 v57.62,14.12
  Bottom 0.2: 57.62,12.22 IC2.11 v57.62,14.12
A16P  (via drill 0.3)
  Top 0.2: IC1.31 33.93,34.88 33.65,34.6 33.65,29.52 34.12,29.05 34.12,17.14 35.39,15.87 48.41,15.87 49.21,15.08 55.71,15.08 56.03,15.39 57.62,15.39 v58.89,14.12
  Bottom 0.2: 58.89,12.22 IC2.10 v58.89,14.12
A17P  (via drill 0.3)
  Top 0.2: IC1.32 34.65,34.13 35.55,34.13 | 35.55,34.13 | 35.55,34.13 35.71,33.97 35.71,33.65 34.12,32.06 34.12,29.68 34.6,29.2 34.6,17.46 35.71,16.35 48.57,16.35 49.37,15.55 55.56,15.55 55.87,15.87 58.41,15.87 v60.16,14.12
  Bottom 0.2: 60.16,12.22 IC2.9 v60.16,14.12
A18P  (via drill 0.3)
  Top 0.2: IC1.29 33.91,36.46 32.7,35.24 32.7,29.2 33.17,28.73 33.17,16.82 35.08,14.92 48.25,14.76 48.89,14.12 v56.35,14.12
  Bottom 0.2: 56.35,12.22 IC2.12 v56.35,14.12
ALE  (via drill 0.3)
  Top 0.2: IC1.43 44.33,32.22 44.28,32.22 v44.28,30.32 | v74.29,29.05 74.29,27.93 74.77,27.46 74.77,14.76 74.13,14.12 IC3.11 74.13,12.06 | v76.35,36.03 75.4,36.98 75.24,37.14 v75.24,37.78
  Bottom 0.2: v44.28,30.32 44.6,30 47.62,30 48.89,31.27 54.92,31.27 56.83,29.36 58.73,29.36 59.21,29.84 60.48,29.84 61.11,29.2 74.13,29.2 v74.29,29.05 75.88,30.63 75.88,35.55 76.03,35.71 v76.35,36.03 | v75.24,37.78 75.24,40 73.97,41.27 IC15.44
AVRCLK
  Top 0.406: 29.68,36.83 29.68,38.1 31.9,40.32 34.44,40.32 34.52,40.39 IC1.24 | SJ5.1 24.44,31.11 29.68,36.35 29.68,36.83 | 29.68,36.83 Q1.1
  Bottom 0.406: 29.68,34.44 C11.1 Q1.1
BSYNC  (via drill 0.3)
  Top 0.2: IC1.15 37.26,49.01 40.32,52.07 41.27,52.07 43.02,53.81 43.02,57.62 v43.65,58.26
  Bottom 0.2: v43.65,58.26 44.13,58.73 44.13,61.43 44.28,61.59 IC6.6
BSYNC3,3  (via drill 0.3)
  Top 0.2: v47.46,74.77 47.78,75.08 57.78,75.08 59.21,73.66 59.84,73.66 v60.8,74.61
  Bottom 0.2: IC6.14 43.02,74.13 43.65,74.77 v47.46,74.77 | v60.8,74.61 IC5.4
CS_R/  (via drill 0.3)
  Top 0.2: v57.62,20.63 57.62,20.95 57.62,25.24 58.1,25.71 58.1,26.35 57.46,26.98 v57.46,30.16
  Bottom 0.2: v57.46,30.16 56.98,30.16 56.35,30.79 IC15.17 | v57.62,20.63 IC2.22
CS_U/  (via drill 0.3)
  Top 0.2: v54.6,29.05 v54.6,32.54
  Bottom 0.2: IC10.11 6.18,29.68 7.14,28.73 8.09,28.73 | 8.09,28.73 | 8.09,28.73 20.95,28.73 21.11,28.89 23.17,28.89 23.33,28.73 34.44,28.73 34.92,28.25 37.78,28.25 38.09,27.93 38.89,27.93 39.2,28.25 43.97,28.25 44.28,28.57 47.94,28.57 48.09,28.57 48.57,29.05 v54.6,29.05 | v54.6,32.54 IC15.18 | IC15.18 | IC15.18 54.76,33.65
D0  (via drill 0.3)
  Top 0.2: IC8.2 v15.08,23.81 18.57,23.81 18.88,24.12 v18.88,32.06 | v30.16,23.81 30.31,23.65 IC12.2 | v45.71,23.81 | v45.71,23.81 45.55,23.65 IC7.2 | v84.13,23.81 84.29,23.65 IC3.2 | v48.73,23.65 48.73,25.24 48.89,25.39 49.05,25.55 49.05,26.03 48.89,26.19 48.89,35.24 49.32,35.67 IC1.51 50.18,35.71 v51.43,35.71 | IC13.18 65.88,34.44 65.88,33.81 65.88,30.95 65.88,30 65.88,29.52 65.88,29.2 65.88,28.89 65.88,25.08 v64.92,24.12
  Bottom 0.2: v15.08,23.81 28.73,23.81 28.89,23.65 29.36,23.65 29.52,23.81 v30.16,23.81 43.49,23.81 43.81,23.49 44.6,23.49 44.92,23.81 v45.71,23.81 47.94,23.81 48.09,23.65 v48.73,23.65 51.11,23.65 51.27,23.65 | v18.88,32.06 IC10.1 | 51.27,23.65 52.86,23.65 53.02,23.49 59.21,23.49 59.37,23.65 64.61,23.65 64.92,23.97 | 65.08,23.81 | 65.08,23.81 65.24,23.65 83.5,23.65 83.66,23.81 v84.13,23.81 84.21,23.73 93.42,23.73 SV7.14 | 51.27,23.65 IC2.17 | 64.92,23.97 v64.92,24.12 | 64.92,23.97 65.08,23.81 | 64.92,23.97 | v51.43,35.71 52.7,35.71 53.17,36.19 IC15.20
D1  (via drill 0.3)
  Top 0.2: IC8.3 v13.81,23.81 13.81,24.44 13.96,24.6 15.39,24.6 15.55,24.44 17.3,24.44 17.61,24.76 v17.61,32.06 | v29.04,24.44 IC12.3 | 44.28,22.38 IC7.3 | 44.28,22.54 44.28,22.38 | v44.13,24.28 44.28,24.12 44.28,22.54 | 44.28,22.54 44.13,22.38 44.28,22.38 | 50.99,34.88 IC1.50 | 50.99,34.88 51.11,34.76 51.11,33.65 50.16,32.7 50.16,25.55 50.48,25.24 v50.48,24.44 | v83.02,24.44 IC3.3 | v51.75,20.47 51.91,20.47 52.54,21.11 52.54,23.97 v52.54,24.44 | IC13.17 64.61,34.44 65.24,33.81 65.24,30.32 65.24,29.68 65.24,29.52 65.24,29.05 65.24,26.51 v63.49,24.6 | 50.99,34.88 51.03,34.92 v52.06,34.92
  Bottom 0.2: v13.81,23.81 13.81,24.44 13.96,24.6 15.39,24.6 15.55,24.44 27.46,24.44 27.62,24.28 28.09,24.28 28.25,24.44 v29.04,24.44 29.68,24.44 29.84,24.6 30.47,24.6 30.63,24.44 33.33,24.44 33.49,24.28 43.49,24.28 v44.13,24.28 44.92,24.28 45.24,24.6 46.19,24.6 46.35,24.44 48.89,24.44 49.21,24.12 50.16,24.12 v50.48,24.44 | v50.48,24.44 | v17.61,32.06 IC10.2 | v50.48,24.44 51.75,24.44 v52.54,24.44 52.86,24.44 53.33,23.97 56.19,23.97 59.05,23.97 59.37,24.28 63.18,24.28 | SV7.13 91.59,24.44 84.77,24.44 84.61,24.6 83.97,24.6 83.81,24.44 v83.02,24.44 82.86,24.28 76.51,24.28 76.35,24.12 71.75,24.12 70.95,24.12 70.16,24.12 67.78,24.12 65.88,24.12 65.08,24.92 63.81,24.92 63.18,24.28 | v51.75,20.47 51.91,20.47 52.54,21.11 IC2.18 | 63.18,24.28 v63.49,24.6 | IC15.19 v52.06,34.92
D2  (via drill 0.3)
  Top 0.2: IC8.4 v12.54,23.81 12.54,24.28 13.33,25.08 15.87,25.08 16.34,25.55 v16.34,32.06 | v27.77,25.08 IC12.4 | v43.17,25.08 43.02,24.92 | 43.02,24.92 | 43.02,24.92 IC7.4 | IC1.49 49.37,33.32 49.37,32.7 49.52,32.54 v49.52,24.92 | v81.91,25.08 81.75,24.92 | 81.75,24.92 | 81.75,24.92 IC3.4 | v54.45,24.76 54.45,22.54 53.81,21.9 v53.81,20.63 | v62.54,25.08 64.61,27.14 64.61,33.17 63.34,34.44 IC13.16 63.34,36.83 63.02,37.14 60.48,37.14 v60.32,37.3 | v60.32,41.27 v60.32,43.65
  Bottom 0.2: v12.54,23.81 12.54,23.97 | 12.54,23.97 | 12.54,23.97 12.54,24.28 13.33,25.08 26.03,25.08 26.19,24.92 26.82,24.92 26.98,25.08 v27.77,25.08 28.57,25.08 28.73,25.24 29.2,25.24 29.36,25.08 33.49,25.08 33.81,24.76 42.86,24.76 v43.17,25.08 46.35,25.08 46.51,24.92 v49.52,24.92 49.84,24.92 50.16,25.24 52.7,25.24 53.17,24.76 v54.45,24.76 54.76,24.44 58.89,24.44 59.21,24.76 62.22,24.76 v62.54,25.08 62.86,25.39 65.24,25.39 66.03,24.6 70.8,24.6 72.07,24.6 76.03,24.6 76.51,25.08 79.84,25.08 80,24.92 80.96,24.92 81.11,25.08 v81.91,25.08 82.54,25.08 82.7,25.24 83.18,25.24 83.34,25.08 88.58,25.08 89.53,26.03 93.18,26.03 SV7.16 | v16.34,32.06 IC10.3 | v53.81,20.63 IC2.19 | v60.32,37.3 v60.32,41.27 | v60.32,43.65 57.78,46.19 56.67,46.19 56.35,46.51 IC15.29
D3  (via drill 0.3)
  Top 0.2: IC8.5 v11.27,23.81 11.27,24.76 12.22,25.71 | v26.5,25.71 IC12.5 | 41.74,22.06 IC7.5 41.74,25.39 v41.59,25.55 | IC1.48 48.27,32.24 48.25,32.22 v48.25,25.71 | v15.08,32.06 15.08,26.03 14.76,25.71 12.22,25.71 | 12.22,25.71 | v80.32,25.71 80.48,25.55 | 80.48,25.55 | 80.48,25.55 IC3.5 | v55.71,25.24 55.71,21.74 54.92,20.95 v54.92,20.63 | IC13.15 62.06,34.44 63.34,33.17 v63.34,30.32 63.34,27.3 v61.59,25.55
  Bottom 0.2: v11.27,23.81 11.27,24.76 12.22,25.71 12.69,25.71 12.85,25.71 24.76,25.71 24.92,25.55 25.55,25.55 25.71,25.71 v26.5,25.71 27.3,25.71 27.46,25.87 28.09,25.87 28.25,25.71 33.65,25.71 34.12,25.24 41.27,25.24 v41.59,25.55 42.38,25.55 42.7,25.87 43.33,25.87 43.65,25.55 44.76,25.55 46.51,25.55 46.67,25.39 47.94,25.39 v48.25,25.71 52.86,25.71 53.02,25.55 55.4,25.55 v55.71,25.24 | v15.08,32.06 IC10.4 | v55.71,25.24 | v55.71,25.24 | v55.71,25.24 | v55.71,25.24 61.27,25.24 v61.59,25.55 61.91,25.87 65.4,25.87 66.19,25.08 75.88,25.08 76.35,25.55 79.69,25.55 79.84,25.71 v80.32,25.71 81.27,25.71 81.43,25.87 82.07,25.87 82.23,25.71 88.58,25.71 90.16,27.3 SV7.15 92.07,27.3 | v54.92,20.63 | v54.92,20.63 55.08,20.79 IC2.20 | IC15.11 63.97,30.95 v63.34,30.32
D4  (via drill 0.3)
  Top 0.2: IC8.6 v10,23.81 10,25.55 10.79,26.35 12.22,26.35 12.54,26.66 v12.54,32.06 | v25.23,26.35 IC12.6 | 40.48,22.06 IC7.6 40.48,25.87 | v40.63,26.03 40.48,25.87 | 40.48,25.87 | IC1.47 47.48,32.24 47.46,32.22 47.46,26.35 v47.3,26.19 | v79.37,26.35 79.21,26.19 | 79.21,26.19 | 79.21,26.19 IC3.6 | v56.51,20.63 56.51,20.95 56.51,21.27 57.14,21.9 57.14,25.87 v57.3,26.03 | v56.51,20.63 | IC13.14 60.8,34.6 61.59,33.81 | 61.59,33.81 | 61.59,33.81 62.06,33.33 v62.06,30.32 62.06,27.46 v60.64,26.03
  Bottom 0.2: v10,23.81 10,25.55 10.79,26.35 | 10.79,26.35 | 10.79,26.35 10.95,26.35 11.58,26.35 11.74,26.35 23.49,26.35 23.65,26.19 24.28,26.19 24.44,26.35 v25.23,26.35 26.03,26.35 26.19,26.51 26.66,26.51 26.82,26.35 33.81,26.35 34.44,25.71 40.32,25.71 v40.63,26.03 40.95,26.35 43.49,26.35 43.81,26.03 44.92,26.03 | 44.92,26.03 | 44.92,26.03 47.14,26.03 47.46,26.35 | 47.46,26.35 v47.3,26.19 | 47.46,26.35 47.62,26.51 48.57,26.51 48.73,26.35 48.89,26.19 53.02,26.19 53.17,26.03 56.19,26.03 56.51,25.71 56.98,25.71 v57.3,26.03 57.62,25.71 60.32,25.71 v60.64,26.03 | v12.54,32.06 IC10.6 | 60.95,26.35 65.56,26.35 66.35,25.55 75.72,25.55 76.35,26.19 79.21,26.19 v79.37,26.35 | v79.37,26.35 | v79.37,26.35 80,26.35 80.16,26.51 80.8,26.51 80.96,26.35 88.58,26.35 90.8,28.57 93.18,28.57 SV7.18 | v56.51,20.63 | v56.51,20.63 56.35,20.79 IC2.21 | IC15.12 62.7,30.95 v62.06,30.32 | 60.95,26.35 v60.64,26.03 | v60.64,26.03 60.95,26.35
D5  (via drill 0.3)
  Top 0.2: IC8.7 v8.73,23.81 8.73,26.03 9.68,26.98 | v23.96,26.98 IC12.7 23.96,20.79 24.76,20 v25.55,20 | 39.2,22.06 IC7.7 39.2,26.03 v39.68,26.51 | v39.68,26.51 | IC1.46 46.69,32.24 46.67,32.22 46.67,26.98 v46.51,26.82 | v11.27,32.06 11.27,27.3 10.95,26.98 10.31,26.98 10.15,26.98 9.68,26.98 | 9.68,26.98 | 9.68,26.98 | v77.78,26.98 77.94,26.82 | 77.94,26.82 | 77.94,26.82 IC3.7 | v56.51,26.66 56.51,21.9 55.71,21.11 55.71,20.47 55.08,19.84 54.13,19.84 v53.97,19.68 | IC13.13 60.16,34.65 60.16,33.81 60.32,33.65 v60.64,33.65 60.64,29.2 61.11,28.73 61.11,27.93 v59.68,26.51 | v77.78,26.98 | v78.26,31.59 77.78,31.11 v77.78,26.98
  Bottom 0.2: v8.73,23.81 8.73,26.03 9.68,26.98 | 9.68,26.98 | 9.68,26.98 10.15,26.98 10.31,26.98 16.5,26.98 16.82,26.98 20.31,26.98 20.47,26.82 23.01,26.82 23.17,26.98 v23.96,26.98 24.76,26.98 24.92,27.14 25.55,27.14 25.71,26.98 33.97,26.98 34.76,26.19 39.36,26.19 v39.68,26.51 39.84,26.66 40,26.82 43.65,26.82 43.97,26.51 45.08,26.51 | 45.08,26.51 | 45.08,26.51 46.19,26.51 46.67,26.98 v46.51,26.82 46.67,26.98 46.82,27.14 47.78,27.14 47.94,26.98 48.73,26.98 49.05,26.66 54.6,26.66 v56.51,26.66 56.67,26.82 57.62,26.82 58.25,26.19 59.37,26.19 v59.68,26.51 60,26.82 65.72,26.82 66.51,26.03 75.56,26.03 76.35,26.82 77.62,26.82 v77.78,26.98 78.73,26.98 78.89,27.14 79.53,27.14 79.69,26.98 88.58,26.98 91.43,29.84 SV7.17 | v11.27,32.06 IC10.7 | v53.97,19.68 53.97,17.93 54.45,17.46 54.45,15.08 55.08,14.44 IC2.13 55.08,12.22 | IC15.13 61.43,32.86 v60.64,33.65 | SV4.5 77.62,42.54 77.94,42.22 77.94,36.35 78.58,35.71 78.58,31.9 v78.26,31.59 | R29.1 26.03,19.52 v25.55,20
D6  (via drill 0.3)
  Top 0.2: v22.7,27.62 IC12.8 | 37.94,22.06 IC7.8 37.94,26.51 v37.46,26.98 | IC1.45 45.89,32.24 45.87,32.22 45.87,27.62 45.71,27.46 v45.55,27.3 | v76.67,27.62 IC3.8 | v10,32.06 10,28.25 9.36,27.62 8.25,27.62 7.46,26.82 v7.46,23.81 IC8.8 | v53.65,27.78 53.65,25.24 53.25,24.84 53.25,21.11 52.54,20.39 v52.54,19.68 | v58.25,27.14 59.21,28.09 59.21,29.2 59.52,29.52 59.52,33.33 v59.21,33.65 58.57,33.65 58.25,33.97 IC13.12
  Bottom 0.2: 45.87,27.62 45.24,26.98 44.13,26.98 43.81,27.3 39.52,27.3 39.2,26.98 39.05,26.98 37.78,26.98 v37.46,26.98 37.14,26.66 35.08,26.66 34.12,27.62 24.44,27.62 24.28,27.78 23.65,27.78 23.49,27.62 v22.7,27.62 22.22,27.62 21.9,27.3 20.79,27.3 20.47,27.62 8.25,27.62 | 45.87,27.62 v45.55,27.3 | 45.87,27.62 48.73,27.62 48.89,27.46 53.33,27.46 v53.65,27.78 55.08,27.78 55.4,27.46 57.94,27.46 v58.25,27.14 58.41,27.3 65.88,27.3 66.67,26.51 74.77,26.51 75.72,27.46 | 75.72,27.46 | 75.72,27.46 76.51,27.46 v76.67,27.62 77.46,27.62 77.62,27.78 78.26,27.78 78.42,27.62 88.58,27.62 90.48,29.52 90.48,30.47 91.12,31.11 93.18,31.11 SV7.20 | 7.46,26.82 8.25,27.62 | 7.46,26.66 7.46,26.82 | 7.46,26.66 | v10,32.06 IC10.8 | 7.46,26.82 8.25,27.62 | 7.46,26.66 7.46,26.82 | v7.46,23.81 7.46,26.66 | v52.54,19.68 52.54,18.57 53.81,17.3 IC2.14 53.81,12.22 | IC15.14 60.16,32.7 v59.21,33.65
D7  (via drill 0.3)
  Top 0.2: v21.42,28.09 IC12.9 | v36.03,27.46 36.03,25.87 36.66,25.24 IC7.9 | IC1.44 45.22,32.24 45.24,32.22 45.08,32.06 45.08,28.25 v44.6,27.78 | v75.4,28.25 IC3.9 | v8.73,32.06 8.88,31.9 8.88,29.05 8.09,28.25 6.98,28.25 6.18,27.46 v6.18,23.81 IC8.9 | v51.91,28.25 51.75,28.09 51.75,23.01 50.79,22.06 v50.79,19.68 | v55.56,28.25 56.51,29.2 56.51,33.17 v56.98,33.65 IC13.11
  Bottom 0.2: 16.98,28.25 7.14,28.25 6.98,28.25 6.18,27.46 v6.18,23.81 | 16.98,28.25 | 34.28,28.25 23.17,28.25 23.01,28.41 22.38,28.41 22.22,28.25 21.58,28.25 v21.42,28.09 21.27,28.25 16.98,28.25 | 34.28,28.25 | 34.28,28.25 35.08,27.46 v36.03,27.46 36.35,27.78 37.62,27.78 37.94,27.46 39.05,27.46 39.36,27.78 v44.6,27.78 45.08,28.09 48.25,28.09 48.57,28.41 51.75,28.41 v51.91,28.25 | v55.56,28.25 54.6,28.25 54.29,28.25 53.97,28.57 52.22,28.57 v51.91,28.25 | v55.56,28.25 56.03,28.25 56.35,27.93 | 56.35,27.93 59.84,27.93 60,27.78 66.03,27.78 66.83,26.98 74.13,26.98 v75.4,28.25 76.19,28.25 76.35,28.41 76.99,28.41 77.15,28.25 88.58,28.25 90,29.68 90,31.74 90.64,32.38 SV7.19 | v8.73,32.06 IC10.9 | v51.91,28.25 51.75,28.25 | 52.54,12.22 IC2.15 52.54,17.93 v50.79,19.68 | 56.35,27.93 56.03,28.25 v55.56,28.25 | IC15.16 57.62,33.02 v56.98,33.65
D+
  Top 0.406: R10.2 14.44,61.27 15.39,62.23 15.39,66.35 14.28,67.46 13.81,67.46 12.06,65.72 X1.3
  Bottom 0.406: X1.3 10.03,65.68 R6.2 9.04,66.51 R8.2
D-  (via drill 0.3)
  Top 0.406: R9.2 12.22,54.61 13.65,56.03 13.65,60.16 12.22,61.59 v10.95,61.59 10.15,62.38 10.15,63.65 10.95,64.45 12.85,64.45 14.09,65.68 | 14.09,65.68 14.12,65.72 | 14.09,65.68 X1.2
  Bottom 0.406: v10.95,61.59 R7.2
DCLK  (via drill 0.3)
  Top 0.2: v57.94,43.33 57.62,43.65 57.62,46.51 57.3,46.83 54.6,46.83 53.33,48.1 53.33,49.68 51.75,51.27 49.52,51.27 49.21,50.95 v48.25,50.95 | v40,53.81 40,59.69 40.63,60.32 v41.11,60.32
  Bottom 0.2: v57.94,43.33 56.67,43.33 56.19,43.81 IC15.26 | v48.25,50.95 | v48.25,50.95 46.98,52.22 41.59,52.22 v40,53.81 | v41.11,60.32 40.48,60.96 IC6.9
DD0  (via drill 0.3)
  Top 0.2: SV1.1 29.04,6.34 IC12.18 v29.04,17.3 | 45.55,12.06 45.55,10.63 46.03,10.16 51.91,10.16 SV2.7 | 45.55,12.06 IC7.19 | v45.55,13.81 45.55,12.06
  Bottom 0.2: v29.04,17.3 29.36,16.98 34.92,16.98 35.39,17.46 44.76,17.46 45.55,16.66 v45.55,13.81
DD1  (via drill 0.3)
  Top 0.2: SV1.2 28.41,4.44 28.41,6.66 27.77,7.3 IC12.17 v27.77,16.82 | 44.28,12.06 44.28,10.16 44.76,9.68 51.59,9.68 55.08,6.19 55.08,4.44 SV2.8 | 44.28,12.06 IC7.18 | v44.28,13.81 44.28,12.06
  Bottom 0.2: v27.77,16.82 | v27.77,16.82 28.09,16.5 35.08,16.5 35.55,16.98 43.49,16.98 44.28,16.19 v44.28,13.81
DD2  (via drill 0.3)
  Top 0.2: SV1.3 26.5,6.34 IC12.16 v26.5,16.35 | 43.02,12.06 43.02,9.84 43.65,9.2 50.32,9.2 SV2.9 | 43.02,12.06 IC7.17 | v43.02,13.81 43.02,12.06
  Bottom 0.2: v26.5,16.35 | v26.5,16.35 26.82,16.03 35.24,16.03 35.71,16.5 42.7,16.5 43.02,16.19 v43.02,13.81
DD3  (via drill 0.3)
  Top 0.2: SV1.4 25.87,4.44 25.87,7.14 25.23,7.77 IC12.15 v25.23,15.87 | 41.74,11.9 41.74,9.2 42.22,8.73 50.16,8.73 52.54,6.34 52.54,4.44 SV2.10 | 41.74,11.9 IC7.16 | v41.74,13.81 41.74,11.9
  Bottom 0.2: v25.23,15.87 | v25.23,15.87 25.55,15.55 35.39,15.55 35.87,16.03 39.52,16.03 40,16.03 40.79,16.03 41.27,16.03 | 41.27,16.03 | 41.27,16.03 41.74,15.55 v41.74,13.81
DD4  (via drill 0.3)
  Top 0.2: SV1.5 24.6,5.87 23.96,6.5 IC12.14 v23.96,15.39 | SV2.11 48.73,8.25 41.11,8.25 40.48,8.89 IC7.15 v40.48,13.81
  Bottom 0.2: v23.96,15.39 | v23.96,15.39 24.28,15.08 35.55,15.08 36.03,15.55 39.52,15.55 40.48,14.92 v40.48,13.81
DD5  (via drill 0.3)
  Top 0.2: SV1.6 23.33,4.44 23.33,8.09 22.7,8.73 IC12.13 v22.7,14.92 | 39.2,12.06 39.2,8.41 39.84,7.77 48.57,7.77 50,6.34 50,4.44 SV2.12 | 39.2,12.06 IC7.14 | v39.2,13.81 39.2,12.06
  Bottom 0.2: v22.7,14.92 | v22.7,14.92 23.01,14.6 35.71,14.6 36.19,15.08 38.41,15.08 39.2,14.28 v39.2,13.81
DD6  (via drill 0.3)
  Top 0.2: SV1.7 21.42,6.34 IC12.12 v21.42,14.44 | SV2.13 47.14,7.3 38.73,7.3 37.94,8.09 IC7.13 v37.94,13.81
  Bottom 0.2: v21.42,14.44 21.74,14.12 35.87,14.12 36.35,14.6 37.62,14.6 37.94,14.28 v37.94,13.81
DD7  (via drill 0.3)
  Top 0.2: SV2.14 47.46,4.44 47.46,6.19 46.82,6.82 38.57,6.82 36.98,8.41 36.98,11.11 36.82,11.32 36.82,11.79 IC7.12 v36.66,13.81 | IC12.11 v20.15,13.81
  Bottom 0.2: v20.15,13.81 | v20.15,13.81 20.31,13.65 36.51,13.65 v36.66,13.81
DREQ  (via drill 0.3)
  Top 0.2: IC1.8 42.77,48.81 44.21,50.24 45.32,50.24 45.55,50.48 46.51,50.48 48.41,52.38 v48.41,53.34
  Bottom 0.2: v48.41,53.34 47.46,54.29 47.46,58.26 46.82,58.89 46.35,58.89 46.19,59.05 46.19,65.88 45.24,66.83 43.65,66.83 40.48,70 IC6.12 40.48,73.02
DREQ/DEM  (via drill 0.3)
  Top 0.2: SJ4.1 56.35,65.08 55.4,64.13 44.44,64.13 43.97,64.61 v42.22,64.61 41.43,65.4 v40.32,65.4
  Bottom 0.2: IC6.8 41.74,64.13 v42.22,64.61 | v40.32,65.4 38.57,67.15 37.3,67.15 36.66,67.78 28.73,67.78 28.41,67.46 SV12.7
E_INT  (via drill 0.3)
  Top 0.2: IC1.7 43.56,48.64 43.81,48.89 44.68,49.76 45.48,49.76 45.71,50 49.05,50 49.68,50.64 51.11,50.64 v51.75,50 | v80.8,31.27 80.8,26.66 81.11,26.35 81.11,19.2 78.58,16.66 78.58,9.36 79.05,8.89 v84.29,8.89 | v96.99,15.87 95.72,17.14 SV7.8
  Bottom 0.2: v51.75,50 54.13,52.38 86.51,52.38 86.99,51.91 86.99,37.46 v80.8,31.27 | v84.29,8.89 85.72,8.89 88.1,6.5 95.08,6.5 96.67,8.09 96.67,15.55 v96.99,15.87
E_SIG1  (via drill 0.3)
  Top 0.2: v87.47,29.05 87.78,28.73 87.78,23.01 v87.47,22.7 | v76.19,29.84 75.88,29.84 v72.7,33.02
  Bottom 0.2: v87.47,29.05 87.15,28.73 77.3,28.73 v76.19,29.84 | v87.47,22.7 88.02,23.25 92.55,23.25 93.18,22.62 93.18,15.87 SV7.6 | v72.7,33.02 72.22,33.02 71.75,33.49 70.95,33.49 IC15.6
E_SIG2  (via drill 0.3)
  Top 0.2: v87.47,30.16 86.67,29.36 86.67,28.41 86.99,28.09 86.99,23.33 86.67,23.01 86.67,22.54 87.78,21.43 87.78,18.89 87.15,18.25 87.15,15.39 v88.42,13.81 | v76.67,34.13 73.18,34.13 v72.7,34.13
  Bottom 0.2: v87.47,30.16 86.51,29.2 77.46,29.2 76.99,29.68 76.99,33.81 v76.67,34.13 | v88.42,13.81 88.89,13.33 93.18,13.33 SV7.4 | IC15.5 71.91,34.92 v72.7,34.13
GND  (via drill 0.3)
  Top 0.2: 85.08,63.5 IC4.4 | C4.2 79.63,63.39 | 67.78,36.67 v67.78,33.65 | 56.83,44.92 56.98,45.4 | 13.17,37.94 13.01,38.1 | 13.17,37.94 12.96,37.83 12.64,37.78 | C35.2 13.17,37.94
  Top 0.406: IC9.15 v94.45,45.72 94.45,46.51 95.88,47.94 96.51,47.94 97.15,48.57 97.15,49.21 97.2,49.21 C22.2 97.2,55.03 SV11.40 | SV11.19 SV11.22 SV11.24 SV11.26 SV11.28 80.48,57.78 | SV4.2 80.48,48.89 80.48,51.75 | 80.48,51.75 | 80.48,51.75 80.48,52.07 80.48,57.78 | 80.48,57.78 SV11.30 | 83.97,62.38 80.48,62.38 80.48,60.32 | 83.97,62.38 85.08,63.5 83.97,62.38 | 80.48,60.32 80.48,57.78 | 80.48,60.32 80.48,62.23 80.64,62.38 | 80.64,62.38 83.97,62.38 | 79.63,63.39 80.64,62.38 | C4.2 78.73,64.13 77.94,64.92 77.94,68.42 78.73,69.21 C34.2 79.69,69.21 v79.69,71.59 | v68.41,71.27 70.32,69.37 70.32,68.73 | C25.2 55.34,35.34 55.71,35.71 55.71,37.14 v56.67,38.1 58.25,39.68 | 70.32,68.73 SJ7.1 | 70.32,68.73 69.37,68.73 69.05,68.42 v69.05,65.88 | v72.7,42.7 70.95,40.95 69.37,40.95 68.1,39.68 | 68.89,37.46 70.11,36.25 C24.2 70.16,35.55 70.16,36.19 68.89,37.46 | 68.57,37.46 67.78,36.67 | SV4.10 80,37.46 81.75,35.71 81.75,30.95 82.23,30.47 83.81,30.47 84.45,31.11 84.92,31.11 C39.- | 68.57,37.46 | 68.57,37.46 68.89,37.46 | C3.1 63.12,67.2 62.38,67.94 v61.75,67.94 61.75,64.13 58.73,61.11 v58.25,61.11 57.3,60.16 56.35,60.16 53.65,62.86 v37.3,62.86 | 68.57,37.46 68.1,37.94 68.1,39.68 | 68.1,39.68 | 58.25,39.68 68.1,39.68 | 58.25,39.68 | 58.25,39.68 56.98,40.95 IC13.10 56.98,45.4 | SV7.2 94.45,9.04 92.86,7.46 90,7.46 88.89,6.34 v88.89,4.28 | C39.- 85.56,35.08 86.61,36.13 C9.1 85.56,35.14 C39.- | C39.- IC3.1 85.56,22.06 86.51,21.11 v86.51,20.47 | 56.83,44.92 55.87,44.92 54.92,44.92 v52.7,44.92 | v52.7,44.92 | IC3.10 74.08,22.22 v73.18,22.22 74.13,22.22 74.13,16.5 73.18,15.55 73.18,11.11 73.5,10.79 v73.5,8.09 | v52.7,44.92 51.59,43.81 51.59,42.22 52.7,41.11 v52.7,40.95 51.43,39.68 51.43,37.78 50.89,37.24 IC1.53 50.14,37.28 50.16,37.3 49.37,37.3 48.89,37.78 v48.25,37.78 48.09,37.62 39.84,37.62 35.55,41.91 34.44,41.91
  Top 0.406: v38.25,65.72 38.25,67.3 v40,69.05 | 36.03,72.07 36.03,73.12 C36.2 35.97,72.12 v36.35,71.75 | 36.03,72.07 36.03,73.34 | v36.35,71.75 36.03,72.07 | R17.1 26.98,74.29 26.35,73.66 26.35,69.69 | v76.03,4.76 75.4,5.39 v73.5,5.39 73.18,5.71 SV2.1 62.54,7.14 59.52,7.14 56.19,10.47 56.19,11.43 | v36.35,71.75 28.41,71.75 26.35,69.69 | C19.2 61.59,15.02 61.59,13.17 60.64,12.22 | SV12.10 26.35,69.69 | 60.64,12.22 56.98,12.22 | 56.98,12.22 60.64,12.22 | 56.98,12.22 | 56.19,11.43 56.98,12.22 | 56.19,11.43 | 56.19,11.43 56.98,12.22 | 56.19,11.43 56.98,12.22 | v22.06,61.27 22.06,59.84 23.33,58.57 SV3.1 23.33,50.41 C5.- | IC1.22 34.56,41.91 34.44,41.91 | 56.19,11.43 50,11.43 v49.21,12.22 | C32.- 5.23,49.21 v6.5,49.21 | 34.44,41.91 33.17,41.91 32.54,42.54 v28.25,42.54 | C29.1 C35.2 12.54,37.78 | 12.54,37.78 12.64,37.78 | 12.54,37.78 12.54,35.87 12.69,35.87 | 12.69,35.87 v6.98,35.87 | IC7.10 35.39,19.84 v35.39,19.68 | 12.69,35.87 v13.65,35.87 15.87,33.65 18.88,33.65 20.31,32.22 | SV8.2 22.06,33.97 20.31,32.22 | 20.31,32.22 | 20.31,32.22 19.52,31.43 19.52,24.44 20.15,23.81 IC12.10 | IC8.10 4.92,20.47 5.39,20 15.87,20 | v18.57,22.06 20,22.06 20.1,22.17 IC12.10 | IC12.10 20.05,22.06 16.34,22.06 | 16.34,20.47 15.87,20 | 16.34,22.06 16.34,20.47 | 16.34,22.06 IC8.1 | 16.34,20.47 16.34,22.06 | 15.87,20 16.34,20.47 | v15.87,18.57 15.87,20 | v31.58,8.09 31.58,5.39 v30.63,4.44
  Bottom 0.2: 63.34,73.02 63.34,71.91 63.65,71.59 66.35,71.59 66.51,71.75 66.51,74.13 66.83,74.45 67.62,74.45 68.41,73.66 IC5.10 | 57.78,47.94 IC15.30 57.62,49.05 | 55.71,49.68 55.87,49.68 | C23.2 51.53,40.79 v52.7,40.95 52.7,41.11
  Bottom 0.406: 97.15,43.81 SV6.2 94.93,43.81 94.45,44.29 v94.45,45.72 | SV11.40 94.87,58.2 C38.1 94.77,62.86 95.08,63.18 | C14.2 59.31,76.89 59.52,76.67 59.52,75.88 60,75.4 62.38,75.4 63.34,74.29 63.34,73.02 IC5.6 | C33.- 93.34,72.07 94.93,70.48 | 94.93,66.99 95.08,66.83 | 94.93,66.99 94.87,67.04 C37.1 94.93,70.48 | 94.93,66.99 94.93,66.83 | 94.93,70.48 94.93,66.99 | 94.93,70.48 89.85,75.56 X2.1 88.08,75.53 85.13,72.59 D3.A 85.13,70.59 84.13,71.59 v79.69,71.59 78.68,72.6 C26.1 76.67,72.54 75.08,72.54 | C15.2 71.17,75.62 71.11,75.56 | 75.72,77.46 75.08,76.83 75.08,75.56 | 71.11,75.56 R13.1 | 75.08,75.56 71.11,75.56 | 75.08,72.54 75.08,75.56 | 75.08,72.54 75.08,71.11 73.97,70 69.69,70 v68.41,71.27 IC5.10 | IC15.10 65.24,33.33 65.56,33.65 v67.78,33.65 | IC15.42 71.59,43.81 v72.7,42.7 | IC15.22 56.03,38.73 v56.67,38.1 | v69.05,65.88 66.99,67.94 v61.75,67.94 | SV11.2 46.19,57.46 45.08,56.35 42.06,56.35 39.84,58.57 39.84,59.21 39.84,60.96 39.2,61.59 IC6.10 39.2,64.45 38.25,65.4 v38.25,65.72 36.66,64.13 36.66,63.5 v37.3,62.86 | 57.62,49.05 56.98,49.68 55.87,49.68 | v58.25,61.11 IC5.27 | 55.71,49.68 53.49,49.68 52.7,48.89 v52.7,44.92 51.75,44.92 51.8,44.98 C28.1 | C20.2 85.72,19.68 v86.51,20.47 86.51,21.11 85.4,22.22 v73.18,22.22 | v88.89,4.28 88.73,4.28 86.19,1.74 78.89,1.74 78.26,2.38 78.26,3.33 T1.2 77.45,3.34 v76.03,4.76 | X1.S1 7.14,68.26 R6.1 5.39,66.67 4.6,65.88 4.6,62.07 5.07,61.59 R7.1 | 51.11,40.64 51.43,40.95 v52.7,40.95 | v40,69.05 38.41,70.64 37.94,70.64 36.82,71.75 v36.35,71.75 | X1.S2 9.22,58.08 7.14,60.16 R7.1 | C21.2 47.04,36.77 47.14,36.67 C30.1 47.04,37.83 47.14,37.78 v48.25,37.78
  Bottom 0.406: v73.5,5.39 v73.5,8.09 | R7.1 7.14,62.39 7.61,62.86 11.74,62.86 X1.4 12.06,61.75 15.23,58.57 22.54,58.57 23.33,57.78 SV3.1 | SV12.10 24.6,67.94 22.7,67.94 | C31.1 1.64,46.77 1.58,46.83 2.53,46.83 3.01,47.3 C32.- | 22.06,67.3 22.7,67.94 | 22.06,67.3 | 22.06,67.3 22.7,67.94 | v22.06,61.27 22.06,67.3 | v49.21,12.22 51.27,12.22 IC2.16 49.23,12.24 v49.21,12.22 | C13.1 5.81,48.52 v6.5,49.21 17.3,49.21 17.93,48.57 17.93,47.78 17.83,47.68 C12.1 20.15,47.62 | v49.21,12.22 49.05,12.38 49.05,20 48.41,20.63 47.14,20.63 46.19,19.68 C18.2 45.71,19.68 45.71,21.11 45.4,21.43 43.33,21.43 41.59,19.68 v35.39,19.68 C17.2 | 29.52,44.6 29.68,44.6 C10.2 29.62,44.6 29.52,44.6 | 28.25,44.6 v28.25,42.54 | C5.- 23.08,50.07 23.01,50 23.01,48.57 22.06,47.62 20.15,47.62 | 28.25,44.6 28.25,43.81 | 28.25,44.6 | 28.25,44.6 29.52,44.6 | 28.25,44.6 26.19,44.6 25.39,43.81 22.85,43.81 22.06,43.02 SV8.8 | 20.15,47.62 20.15,44.45 SV8.8 | IC10.10 7.46,35.4 v6.98,35.87 | 13.81,33.65 IC10.5 13.81,35.71 v13.65,35.87 | 23.17,32.7 29.68,32.7 C11.2 29.58,32.7 23.17,32.7 | 23.17,32.7 22.85,32.7 22.06,33.49 SV8.2 SV8.4 SV8.6 SV8.8 | C17.2 30.47,19.68 | C17.2 30.53,21.21 30.16,21.58 19.04,21.58 v18.57,22.06 | v15.87,18.57 15.87,16.82 15.71,16.66 C16.2 14.34,16.72 13.81,16.19 13.81,6.98 13.17,6.34 13.17,4.6 11.9,3.33 | SJ1.1 31.58,9.14 v31.58,8.09 | v30.63,4.44 13.01,4.44 11.9,3.33 | SV1.16 11.9,3.33
  pour Bottom (isolate 0.381, rank 2): 0.47,79.37 99.53,79.37 99.53,0.63 0.47,0.63
  pour Top (isolate 0.381, rank 2): 0.47,79.37 0.47,0.63 99.53,0.63 99.53,79.37
GNDA  (via drill 0.3)
  Top 0.406: v70.32,64.45 SJ7.2 | 65.24,60.64 v69.69,60.64 | 65.24,60.64 v65.24,61.11 | v65.24,58.57 65.24,60.64 | v51.27,47.14 51.27,45.4 50.95,45.08 50.32,45.08 50.28,45.12 IC1.63 | SV5.2 39.84,75.88 38.73,74.77 36.19,74.77 35.08,75.88 35.08,77.62 33.81,78.89 31.9,78.89 29.68,76.67 | 20.79,62.07 | v20.63,62.07 20.79,62.07 | 20.79,62.07 20.15,62.7 20.15,64.45 20.63,64.92 21.58,64.92 22.06,65.4 22.06,67.94 SV12.12 25.39,71.27 25.39,75.08 26.5,76.19 29.2,76.19 29.68,76.67 | 29.68,76.67
  Bottom 0.2: IC5.18 69.69,63.81
  Bottom 0.406: 69.69,63.81 v70.32,64.45 | C27.1 76.67,61.43 75.88,60.64 v69.69,60.64 69.69,61.43 IC5.18 | v65.24,61.11 65.88,61.75 IC5.21 | IC5.25 60.8,61.43 61.11,61.11 v65.24,61.11 | v65.24,61.11 | v65.24,58.57 65.24,57.15 64.61,56.51 50.63,56.51 50,55.88 50,52.86 49.52,52.38 49.21,52.38 | 49.21,52.38 49.21,49.21 49.37,49.05 49.84,49.05 50,48.89 50,48.41 v51.27,47.14 | 41.74,53.34 | 41.74,53.34 41.9,53.18 45.4,53.18 45.71,52.86 47.62,52.86 48.09,52.38 49.21,52.38 | 41.74,53.34 SV10.1 37.3,58.73 36.51,59.53 22.06,59.53 20.63,60.96 v20.63,62.07
  pour Top (isolate 0.5): 36.03,79.37 33.49,76.83 33.49,74.29 34.76,73.02 48.73,73.02 51.27,70.48 51.27,61.59 53.81,59.05 70.32,59.05 72.86,61.59 72.86,76.83 70.32,79.37